# EAGLE board CT_schematic (EAGLE 7.6.0)

Size 100 x 80 mm. Coordinates in mm from the lower left corner, seen from the top.
Outline: 0,0 100,0 100,80 0,80 0,0
Copper layers (1*16): Top 0.035mm / dielectric 1.5mm / Bottom 0.035mm
Design rules "default": minimum track width 10mil, minimum drill 24mil, track to track 8mil, track to pad 8mil, pad to pad 8mil, via to via 8mil, smd to smd 8mil, copper to edge 40mil, drill to drill 8mil, minimum pad ring 10mil, minimum via ring 8mil, stop-mask expansion 4mil, vias tented up to drill 0mil, thermal gap 10mil

## Footprints (pad centres in the part's own frame; a part is rotated, then mirrored left to right if it is on the bottom)
C0603 = smd 0.8 x 0.8: 1 -0.762,0; 2 0.762,0
C0402 = smd 0.5 x 0.5: 1 -0.508,0; 2 0.508,0
C0805 = smd 1.2 x 1.3: 1 -1.016,0; 2 1.016,0
C1210 = smd 1.2 x 2.5: 1 -1.524,0; 2 1.524,0
C1206 = smd 1.3 x 1.6: 1 -1.524,0; 2 1.524,0
2220 = smd 1.85 x 5.5: 1 -2.55,0; 2 2.55,0
R0603 = smd 0.8 x 0.8: 1 -0.762,0; 2 0.762,0
EXV-9H = smd 3.505 x 1.676: 1 -2.857,0; 2 2.857,0
L0603 = smd 0.8 x 0.8: 1 -0.762,0; 2 0.762,0
DR1040 = smd 1.6 x 3.2: 1 -4.458,0; 2 4.458,0
L1210 = smd 1.2 x 2.5: 1 -1.524,0; 2 1.524,0
PJ-037B_PACKAGE = drill 3.7 square: 1 12,0 | drill 3.2 square: 2 6,0
LQFP176 = smd 0.3 x 1.2: 1 -10.75,-12.75; 2 -10.25,-12.75; 3 -9.75,-12.75; 4 -9.25,-12.75; 5 -8.75,-12.75; 6 -8.25,-12.75; 7 -7.75,-12.75; 8 -7.25,-12.75; 9 -6.75,-12.75; 10 -6.25,-12.75; 11 -5.75,-12.75; 12 -5.25,-12.75; 13 -4.75,-12.75; 14 -4.25,-12.75; 15 -3.75,-12.75; 16 -3.25,-12.75; 17 -2.75,-12.75; 18 -2.25,-12.75; 19 -1.75,-12.75; 20 -1.25,-12.75; 21 -0.75,-12.75; 22 -0.25,-12.75; 23 0.25,-12.75; 24 0.75,-12.75; 25 1.25,-12.75; 26 1.75,-12.75; 27 2.25,-12.75; 28 2.75,-12.75; 29 3.25,-12.75; 30 3.75,-12.75; 31 4.25,-12.75; 32 4.75,-12.75; 33 5.25,-12.75; 34 5.75,-12.75; 35 6.25,-12.75; 36 6.75,-12.75; 37 7.25,-12.75; 38 7.75,-12.75; 39 8.25,-12.75; 40 8.75,-12.75; 41 9.25,-12.75; 42 9.75,-12.75; 43 10.25,-12.75; 44 10.75,-12.75; 89 10.75,12.75; 90 10.25,12.75; 91 9.75,12.75; 92 9.25,12.75; 93 8.75,12.75; 94 8.25,12.75; 95 7.75,12.75; 96 7.25,12.75; 97 6.75,12.75; 98 6.25,12.75; 99 5.75,12.75; 100 5.25,12.75; 101 4.75,12.75; 102 4.25,12.75; 103 3.75,12.75; 104 3.25,12.75; 105 2.75,12.75; 106 2.25,12.75; 107 1.75,12.75; 108 1.25,12.75; 109 0.75,12.75; 110 0.25,12.75; 111 -0.25,12.75; 112 -0.75,12.75; 113 -1.25,12.75; 114 -1.75,12.75; 115 -2.25,12.75; 116 -2.75,12.75; 117 -3.25,12.75; 118 -3.75,12.75; 119 -4.25,12.75; 120 -4.75,12.75; 121 -5.25,12.75; 122 -5.75,12.75; 123 -6.25,12.75; 124 -6.75,12.75; 125 -7.25,12.75; 126 -7.75,12.75; 127 -8.25,12.75; 128 -8.75,12.75; 129 -9.25,12.75; 130 -9.75,12.75; 131 -10.25,12.75; 132 -10.75,12.75 | smd 1.2 x 0.3: 45 12.75,-10.75; 46 12.75,-10.25; 47 12.75,-9.75; 48 12.75,-9.25; 49 12.75,-8.75; 50 12.75,-8.25; 51 12.75,-7.75; 52 12.75,-7.25; 53 12.75,-6.75; 54 12.75,-6.25; 55 12.75,-5.75; 56 12.75,-5.25; 57 12.75,-4.75; 58 12.75,-4.25; 59 12.75,-3.75; 60 12.75,-3.25; 61 12.75,-2.75; 62 12.75,-2.25; 63 12.75,-1.75; 64 12.75,-1.25; 65 12.75,-0.75; 66 12.75,-0.25; 67 12.75,0.25; 68 12.75,0.75; 69 12.75,1.25; 70 12.75,1.75; 71 12.75,2.25; 72 12.75,2.75; 73 12.75,3.25; 74 12.75,3.75; 75 12.75,4.25; 76 12.75,4.75; 77 12.75,5.25; 78 12.75,5.75; 79 12.75,6.25; 80 12.75,6.75; 81 12.75,7.25; 82 12.75,7.75; 83 12.75,8.25; 84 12.75,8.75; 85 12.75,9.25; 86 12.75,9.75; 87 12.75,10.25; 88 12.75,10.75; 133 -12.75,10.75; 134 -12.75,10.25; 135 -12.75,9.75; 136 -12.75,9.25; 137 -12.75,8.75; 138 -12.75,8.25; 139 -12.75,7.75; 140 -12.75,7.25; 141 -12.75,6.75; 142 -12.75,6.25; 143 -12.75,5.75; 144 -12.75,5.25; 145 -12.75,4.75; 146 -12.75,4.25; 147 -12.75,3.75; 148 -12.75,3.25; 149 -12.75,2.75; 150 -12.75,2.25; 151 -12.75,1.75; 152 -12.75,1.25; 153 -12.75,0.75; 154 -12.75,0.25; 155 -12.75,-0.25; 156 -12.75,-0.75; 157 -12.75,-1.25; 158 -12.75,-1.75; 159 -12.75,-2.25; 160 -12.75,-2.75; 161 -12.75,-3.25; 162 -12.75,-3.75; 163 -12.75,-4.25; 164 -12.75,-4.75; 165 -12.75,-5.25; 166 -12.75,-5.75; 167 -12.75,-6.25; 168 -12.75,-6.75; 169 -12.75,-7.25; 170 -12.75,-7.75; 171 -12.75,-8.25; 172 -12.75,-8.75; 173 -12.75,-9.25; 174 -12.75,-9.75; 175 -12.75,-10.25; 176 -12.75,-10.75
SAMTEC_FTSH-105-01-L-DV-K = smd 0.762 x 2.794: 1 -2.54,-2.032; 2 -2.54,2.032; 3 -1.27,-2.032; 4 -1.27,2.032; 5 0,-2.032; 6 0,2.032; 7 1.27,-2.032; 8 1.27,2.032; 9 2.54,-2.032; 10 2.54,2.032
LH430WV2-SD01 = smd 0.23 x 0.7: 1 0,0; 2 -0.4,0; 3 -0.8,0; 4 -1.2,0; 5 -1.6,0; 6 -2,0; 7 -2.4,0; 8 -2.8,0; 9 -3.2,0; 10 -3.6,0; 11 -4,0; 12 -4.4,0; 13 -4.8,0; 14 -5.2,0; 15 -5.6,0; 16 -5.6,-2.15; 17 -5.2,-2.15; 18 -4.8,-2.15; 19 -4.4,-2.15; 20 -4,-2.15; 21 -3.6,-2.15; 22 -3.2,-2.15; 23 -2.8,-2.15; 24 -2.4,-2.15; 25 -2,-2.15; 26 -1.6,-2.15; 27 -1.2,-2.15; 28 -0.8,-2.15; 29 -0.4,-2.15; 30 0,-2.15
MOLEX_47219-2001 = smd 0.8 x 1.5: 1 3.2,-2.1; 2 2.1,-2.1; 3 1,-2.1; 4 -0.1,-2.1; 5 -1.2,-2.1; 6 -2.3,-2.1; 7 -3.4,-2.1; 8 -4.5,-2.1 | smd 1.5 x 2.05: G1 6.875,-4.7; G2 6.875,3.6; G3 -6.875,3.6; G4 -6.875,-4.7
QFN-28 = smd 0.813 x 0.305: 1 -2.451,1.5; 2 -2.451,1; 3 -2.451,0.5; 4 -2.451,0; 5 -2.451,-0.5; 6 -2.451,-1; 7 -2.451,-1.5; 15 2.451,-1.5; 16 2.451,-1; 17 2.451,-0.5; 18 2.451,0; 19 2.451,0.5; 20 2.451,1; 21 2.451,1.5 | smd 0.305 x 0.813: 8 -1.5,-2.451; 9 -1,-2.451; 10 -0.5,-2.451; 11 0,-2.451; 12 0.5,-2.451; 13 1,-2.451; 14 1.5,-2.451; 22 1.5,2.451; 23 1,2.451; 24 0.5,2.451; 25 0,2.451; 26 -0.5,2.451; 27 -1,2.451; 28 -1.5,2.451 | smd 3.607 x 3.607: 29 0,0
SJ-43515TS-SMT-TR = smd 2.2 x 3: 1 0.6,-7.4; 4 3.4,-7.4 | smd 3 x 3: 2 12.8,-7.4; 5 17,-3 | smd 2 x 3: 3 5.3,0; 6 2.5,0 | drill 1.8: P$7 4.5,-3.69; P$8 11.54,-3.69
ABS07-32.768KHZ-7-T = smd 1.1 x 2.4: 1 -2.5,0; 2 0,0
ABLS-25.000MHZ-B2F-T = smd 5.6 x 2.8: 1 -3.81,0; 2 5.69,0
ABLS-12.288MHZ-B4-T = smd 5.6 x 2.8: 1 -3.81,0; 2 5.69,0
WSON-8 = smd 0.3 x 0.6: 1 -0.75,0; 2 0.05,0; 3 0.85,0; 4 1.65,0; 5 1.65,3.8; 6 0.85,3.8; 7 0.05,3.8; 8 -0.75,3.8 | smd 3 x 2.6: PAD 0.45,1.9
SOIC-8_EP = smd 1.6 x 0.533: 1 -2.921,1.905; 2 -2.921,0.635; 3 -2.921,-0.635; 4 -2.921,-1.905; 5 2.921,-1.905; 6 2.921,-0.635; 7 2.921,0.635; 8 2.921,1.905 | smd 2.54 x 3.302: EPAD 0,0 | drill 0.406 pad 0.406: P$1 -0.508,0.635; P$2 0.381,0.635; P$3 -0.508,-0.635; P$4 0.381,-0.635
QFN-16_EP = smd 0.805 x 0.3: 1 -1.452,0.75; 2 -1.452,0.25; 3 -1.452,-0.25; 4 -1.452,-0.75; 9 1.452,-0.75; 10 1.452,-0.25; 11 1.452,0.25; 12 1.452,0.75 | smd 0.3 x 0.805: 5 -0.75,-1.452; 6 -0.25,-1.452; 7 0.25,-1.452; 8 0.75,-1.452; 13 0.75,1.452; 14 0.25,1.452; 15 -0.25,1.452; 16 -0.75,1.452 | smd 1.55 x 1.55: 17 0,0
DFN-8_DDB = smd 0.805 x 0.3: 1 -0.952,0.75; 2 -0.952,0.25; 3 -0.952,-0.25; 4 -0.952,-0.75; 5 0.952,-0.75; 6 0.952,-0.25; 7 0.952,0.25; 8 0.952,0.75 | smd 0.61 x 2.2: 9 0,0
QFN-38_UHF = smd 0.75 x 0.3: 1 -2.4,2.75; 2 -2.4,2.25; 3 -2.4,1.75; 4 -2.4,1.25; 6 -2.4,0.25; 7 -2.4,-0.25; 8 -2.4,-0.75; 9 -2.4,-1.25; 10 -2.4,-1.75; 11 -2.4,-2.25; 12 -2.4,-2.75; 20 2.4,-2.75; 21 2.4,-2.25; 22 2.4,-1.75; 23 2.4,-1.25; 24 2.4,-0.75; 25 2.4,-0.25; 26 2.4,0.25; 27 2.4,0.75; 28 2.4,1.25; 29 2.4,1.75; 30 2.4,2.25; 31 2.4,2.75 | smd 0.758 x 0.3: 5 -2.4,0.75 | smd 0.3 x 0.75: 13 -1.5,-3.4; 14 -1,-3.4; 15 -0.5,-3.4; 16 0,-3.4; 17 0.5,-3.4; 18 1,-3.4; 19 1.5,-3.4; 32 1.5,3.4; 33 1,3.4; 34 0.5,3.4; 35 0,3.4; 36 -0.5,3.4; 37 -1,3.4; 38 -1.5,3.4 | smd 3.2 x 5.2: 39 0,0
IRF8306MTRPBF = smd 0.9 x 1.85: 1 0,0; 2 0,-2.35; 6 6.4,0; 7 6.4,-2.35 | smd 0.75 x 0.75: 3 1.75,-1.175 | smd 1.45 x 0.87: 4 3.5,-0.565; 5 3.5,-1.785
SW_4-1437565-2 = smd 1.4 x 2.1: 1 -2.23,4.55; 2 -2.23,-4.55; 3 2.23,4.55; 4 2.23,-4.55
LGM67K-G1J2-24-Z = smd 0.8 x 1.4: A -2,0; C 0,0
NC7SZ125M5X = smd 1.3 x 0.7: 1 -1.3,0.95; 2 -1.3,0; 3 -1.3,-0.95; 4 1.3,-0.95; 5 1.3,0.95

## Placement (x,y rotation side)
C1  1e-06  [C0603]  -34.29,96.52 0 top  (outside the outline)
C2  1e-07  [C0603]  -38.1,96.52 0 top  (outside the outline)
C3  1e-07  [C0603]  -41.91,96.52 0 top  (outside the outline)
C4  1e-07  [C0603]  -45.72,96.52 0 top  (outside the outline)
C5  1e-07  [C0603]  -49.53,96.52 0 top  (outside the outline)
C6  1e-07  [C0603]  -53.34,96.52 0 top  (outside the outline)
C7  1e-07  [C0603]  -57.15,96.52 0 top  (outside the outline)
C8  1e-07  [C0603]  -60.96,96.52 0 top  (outside the outline)
C9  1e-07  [C0603]  -64.77,96.52 0 top  (outside the outline)
C10  1e-07  [C0603]  -68.58,96.52 0 top  (outside the outline)
C11  1e-07  [C0603]  -72.39,96.52 0 top  (outside the outline)
C12  1e-07  [C0603]  -76.2,96.52 0 top  (outside the outline)
C13  1e-07  [C0603]  -80.01,96.52 0 top  (outside the outline)
C14  1e-07  [C0603]  -83.82,96.52 0 top  (outside the outline)
C15  1e-07  [C0603]  -87.63,96.52 0 top  (outside the outline)
C16  1e-07  [C0603]  -91.44,96.52 0 top  (outside the outline)
C17  1e-07  [C0603]  -95.25,96.52 0 top  (outside the outline)
C18  4.7e-06  [C0603]  -15.24,96.52 0 top  (outside the outline)
C19  1e-07  [C0603]  -99.06,96.52 0 top  (outside the outline)
C20  1e-08  [C0603]  -15.24,101.6 0 top  (outside the outline)
C21  1e-06  [C0603]  -19.05,101.6 0 top  (outside the outline)
C22  1e-07  [C0603]  -22.86,101.6 0 top  (outside the outline)
C23  2.2e-06  [C0603]  -19.05,96.52 0 top  (outside the outline)
C24  1e-07  [C0603]  -26.67,101.6 0 top  (outside the outline)
C25  1e-07  [C0603]  -30.48,101.6 0 top  (outside the outline)
C26  1e-11  [C0402]  -39.37,106.68 0 top  (outside the outline)
C27  1e-11  [C0402]  -43.18,106.68 0 top  (outside the outline)
C28  1e-11  [C0402]  -46.99,106.68 0 top  (outside the outline)
C29  1e-11  [C0402]  -50.8,106.68 0 top  (outside the outline)
C30  1e-07  [C0402]  -54.61,106.68 0 top  (outside the outline)
C31  1e-07  [C0402]  -58.42,106.68 0 top  (outside the outline)
C32  1e-07  [C0402]  -62.23,106.68 0 top  (outside the outline)
C33  1e-07  [C0402]  -66.04,106.68 0 top  (outside the outline)
C34  1e-07  [C0402]  -69.85,106.68 0 top  (outside the outline)
C35  1e-07  [C0402]  -73.66,106.68 0 top  (outside the outline)
C36  1e-07  [C0402]  -77.47,106.68 0 top  (outside the outline)
C37  1e-05  [C0805]  -34.29,81.28 0 top  (outside the outline)
C38  2.2e-05  [C1210]  -24.13,73.66 0 top  (outside the outline)
C39  2.2e-05  [C1210]  -30.48,73.66 0 top  (outside the outline)
C40  1e-09  [C0402]  -81.28,106.68 0 top  (outside the outline)
C41  1e-09  [C0402]  -85.09,106.68 0 top  (outside the outline)
C42  1e-07  [C0402]  -88.9,106.68 0 top  (outside the outline)
C43  1e-07  [C0402]  -92.71,106.68 0 top  (outside the outline)
C44  1e-07  [C0402]  -96.52,106.68 0 top  (outside the outline)
C45  1e-07  [C0402]  -15.24,111.76 0 top  (outside the outline)
C46  1e-07  [C0402]  -19.05,111.76 0 top  (outside the outline)
C47  1e-05  [C0805]  -39.37,81.28 0 top  (outside the outline)
C48  1e-05  [C0805]  -44.45,81.28 0 top  (outside the outline)
C49  1e-05  [C0805]  -49.53,81.28 0 top  (outside the outline)
C50  1e-05  [C0805]  -54.61,81.28 0 top  (outside the outline)
C51  1e-05  [C0805]  -59.69,81.28 0 top  (outside the outline)
C52  2.2e-11  [C0402]  -31.75,106.68 0 top  (outside the outline)
C53  2.2e-11  [C0402]  -35.56,106.68 0 top  (outside the outline)
C54  1e-08  [C0402]  -22.86,111.76 0 top  (outside the outline)
C55  1e-05  [C1206]  -81.28,73.66 0 top  (outside the outline)
C56  1e-05  [C0805]  -64.77,81.28 0 top  (outside the outline)
C57  1e-05  [C1210]  -36.83,73.66 0 top  (outside the outline)
C58  1e-05  [C1210]  -43.18,73.66 0 top  (outside the outline)
C59  1e-05  [C1210]  -49.53,73.66 0 top  (outside the outline)
C60  1e-05  [C1210]  -55.88,73.66 0 top  (outside the outline)
C61  1e-08  [C0402]  -26.67,111.76 0 top  (outside the outline)
C62  1e-05  [C1206]  -87.63,73.66 0 top  (outside the outline)
C63  1e-05  [C1210]  -62.23,73.66 0 top  (outside the outline)
C64  1e-05  [C0805]  -69.85,81.28 0 top  (outside the outline)
C65  1e-06  [C0603]  -34.29,101.6 0 top  (outside the outline)
C66  1e-07  [C0402]  -30.48,111.76 0 top  (outside the outline)
C67  6.8e-05  [2220]  -77.47,46.99 0 top  (outside the outline)
C68  1e-05  [C1210]  -68.58,73.66 0 top  (outside the outline)
C69  2.2e-06  [C0603]  -22.86,96.52 0 top  (outside the outline)
C70  2.2e-07  [C0603]  -26.67,96.52 0 top  (outside the outline)
C71  1e-08  [C0402]  -34.29,111.76 0 top  (outside the outline)
C72  1e-05  [C1206]  -93.98,73.66 0 top  (outside the outline)
C73  1e-05  [C0805]  -74.93,81.28 0 top  (outside the outline)
C74  1e-07  [C0402]  -38.1,111.76 0 top  (outside the outline)
C75  2.2e-06  [C0603]  -30.48,96.52 0 top  (outside the outline)
C76  2.45e-08  [R0603]  -77.47,86.36 0 top  (outside the outline)
C77  2.8258362168397e-09  [R0603]  -85.09,80.01 0 top  (outside the outline)
C78  7.105e-09  [R0603]  -16.51,86.36 0 top  (outside the outline)
C79  0.0001  [EXV-9H]  -67.31,58.42 0 top  (outside the outline)
C80  0.0001  [EXV-9H]  -78.74,58.42 0 top  (outside the outline)
C81  1e-08  [C0402]  -41.91,111.76 0 top  (outside the outline)
C82  1e-08  [C0402]  -45.72,111.76 0 top  (outside the outline)
C83  1e-08  [C0402]  -49.53,111.76 0 top  (outside the outline)
F1  240.0  [L0603]  -38.1,101.6 0 top  (outside the outline)
I1  5.2e-06  [DR1040]  -38.1,46.99 0 top  (outside the outline)
I2  1e-05  [L1210]  -74.93,73.66 0 top  (outside the outline)
J1  PJ-037B  [PJ-037B_PACKAGE]  -83.82,34.29 0 top  (outside the outline)
R2  1000.0  [R0603]  -41.91,101.6 0 top  (outside the outline)
R7  4700.0  [R0603]  -45.72,101.6 0 top  (outside the outline)
R8  4700.0  [R0603]  -49.53,101.6 0 top  (outside the outline)
R9  2200.0  [R0603]  -53.34,101.6 0 top  (outside the outline)
R10  10000.0  [R0603]  -82.55,86.36 0 top  (outside the outline)
R11  10000.0  [R0603]  -87.63,86.36 0 top  (outside the outline)
R12  10000.0  [R0603]  -92.71,86.36 0 top  (outside the outline)
R13  10000.0  [R0603]  -97.79,86.36 0 top  (outside the outline)
R14  10000.0  [R0603]  -15.24,91.44 0 top  (outside the outline)
R15  10000.0  [R0603]  -20.32,91.44 0 top  (outside the outline)
R16  5.0  [R0603]  -57.15,101.6 0 top  (outside the outline)
R17  10000.0  [R0603]  -25.4,91.44 0 top  (outside the outline)
R18  100000.0  [R0603]  -21.59,86.36 0 top  (outside the outline)
R19  100000.0  [R0603]  -26.67,86.36 0 top  (outside the outline)
R20  100000.0  [R0603]  -31.75,86.36 0 top  (outside the outline)
R21  100000.0  [R0603]  -36.83,86.36 0 top  (outside the outline)
R22  100000.0  [R0603]  -41.91,86.36 0 top  (outside the outline)
R23  100000.0  [R0603]  -46.99,86.36 0 top  (outside the outline)
R24  47000.0  [R0603]  -30.48,91.44 0 top  (outside the outline)
R25  47000.0  [R0603]  -35.56,91.44 0 top  (outside the outline)
R26  47000.0  [R0603]  -40.64,91.44 0 top  (outside the outline)
R27  680.0  [R0603]  -60.96,101.6 0 top  (outside the outline)
R28  100000.0  [R0603]  -52.07,86.36 0 top  (outside the outline)
R29  200.0  [R0603]  -64.77,101.6 0 top  (outside the outline)
R30  1000.0  [R0603]  -68.58,101.6 0 top  (outside the outline)
R31  910.0  [R0603]  -72.39,101.6 0 top  (outside the outline)
R32  2200.0  [R0603]  -76.2,101.6 0 top  (outside the outline)
R33  100000.0  [R0603]  -57.15,86.36 0 top  (outside the outline)
R34  1800.0  [R0603]  -80.01,101.6 0 top  (outside the outline)
R35  1000.0  [R0603]  -83.82,101.6 0 top  (outside the outline)
R36  20000.0  [R0603]  -45.72,91.44 0 top  (outside the outline)
R37  91000.0  [R0603]  -50.8,91.44 0 top  (outside the outline)
R38  300000.0  [R0603]  -62.23,86.36 0 top  (outside the outline)
R39  100000.0  [R0603]  -67.31,86.36 0 top  (outside the outline)
R40  1600000.0  [R0603]  -97.79,80.01 0 top  (outside the outline)
R41  100000.0  [R0603]  -72.39,86.36 0 top  (outside the outline)
R42  200.0  [R0603]  -87.63,101.6 0 top  (outside the outline)
R43  1000.0  [R0603]  -91.44,101.6 0 top  (outside the outline)
R44  10000.0  [R0603]  -55.88,91.44 0 top  (outside the outline)
R45  75000.0  [R0603]  -60.96,91.44 0 top  (outside the outline)
R46  10000.0  [R0603]  -66.04,91.44 0 top  (outside the outline)
R47  10000.0  [R0603]  -71.12,91.44 0 top  (outside the outline)
R48  95300.0  [R0603]  -76.2,91.44 0 top  (outside the outline)
R49  95300.0  [R0603]  -81.28,91.44 0 top  (outside the outline)
R50  10000.0  [R0603]  -86.36,91.44 0 top  (outside the outline)
R51  10000.0  [R0603]  -91.44,91.44 0 top  (outside the outline)
R52  10000.0  [R0603]  -96.52,91.44 0 top  (outside the outline)
R53  83745.454545455  [R0603]  -92.71,80.01 0 top  (outside the outline)
U1  STM32F779IIT6  [LQFP176]  -26.67,13.97 0 top  (outside the outline)
U2  FTSH-105-01-L-DV-K  [SAMTEC_FTSH-105-01-L-DV-K]  -83.82,7.62 0 top  (outside the outline)
U3  LH430WV2-SD01  [LH430WV2-SD01]  -15.24,107.95 0 top  (outside the outline)
U4  0472192001  [MOLEX_47219-2001]  -50.8,8.89 0 top  (outside the outline)
U5  WM8731CLSEFL  [QFN-28]  -16.51,74.93 0 top  (outside the outline)
U6  SJ-43515TS-SMT-TR  [SJ-43515TS-SMT-TR]  -39.37,36.83 0 top  (outside the outline)
U7  SJ-43515TS-SMT-TR  [SJ-43515TS-SMT-TR]  -67.31,36.83 0 top  (outside the outline)
U8  ABS07-32.768KHZ-7-T  [ABS07-32.768KHZ-7-T]  -69.85,67.31 0 top  (outside the outline)
U9  ABLS-25.000MHZ-B2F-T  [ABLS-25.000MHZ-B2F-T]  -26.67,67.31 0 top  (outside the outline)
U10  ABLS-12.288MHZ-B4-T  [ABLS-12.288MHZ-B4-T]  -46.99,67.31 0 top  (outside the outline)
U11  LP3878SDX-ADJ/NOPB  [WSON-8]  -99.06,44.45 0 top  (outside the outline)
U12  MIC5234YME  [SOIC-8_EP]  -78.74,66.04 0 top  (outside the outline)
U13  LP3878SDX-ADJ/NOPB  [WSON-8]  -30.48,57.15 0 top  (outside the outline)
U14  LTC3601EUD#PBF  [QFN-16_EP]  -25.4,106.68 0 top  (outside the outline)
U15  LT3494AEDDB#TRMPBF  [DFN-8_DDB]  -53.34,111.76 0 top  (outside the outline)
U16  LP3878SDX-ADJ/NOPB  [WSON-8]  -50.8,57.15 0 top  (outside the outline)
U17  LTC2928CUHF#PBF  [QFN-38_UHF]  -57.15,58.42 0 top  (outside the outline)
U18  IRF8306MTRPbF  [IRF8306MTRPBF]  -57.15,48.26 0 top  (outside the outline)
U19  IRF8306MTRPbF  [IRF8306MTRPBF]  -72.39,48.26 0 top  (outside the outline)
U20  4-1437565-2  [SW_4-1437565-2]  -27.94,48.26 0 top  (outside the outline)
U21  Q65110A2395  [LGM67K-G1J2-24-Z]  -87.63,67.31 0 top  (outside the outline)
U22  nc7sz125m5x  [NC7SZ125M5X]  -15.24,80.01 0 top  (outside the outline)
U23  nc7sz125m5x  [NC7SZ125M5X]  -21.59,80.01 0 top  (outside the outline)
U24  nc7sz125m5x  [NC7SZ125M5X]  -27.94,80.01 0 top  (outside the outline)

## Library data of the parts
C1-C83 F1 I1 I2 J1 R2 R7-R53 U1-U24 = circuit_tree

## Nets
CLK_CRYSTAL_U1_9: C26.1 U1.9 U8.1
CLK_CRYSTAL_U1_10: C27.1 U1.10 U8.2
CLK_CRYSTAL_U1_29: C28.1 U1.29 U9.1
CLK_CRYSTAL_U1_30: C29.1 U1.30 U9.2
CLK_CRYSTAL_U5_1: C52.1 U5.1 U10.1
CLK_CRYSTAL_U5_2: C53.1 U5.2 U10.2
GND: C1.2 C2.2 C3.2 C4.2 C5.2 C6.2 C7.2 C8.2 C9.2 C10.2 C11.2 C12.2 C13.2 C14.2 C15.2 C16.2 C17.2 C18.2 C19.2 C20.2 C21.2 C22.2 C23.2 C24.2 C25.2 C26.2 C27.2 C28.2 C29.2 C30.2 C31.2 C32.2 C33.2 C34.2 C35.2 C36.2 C37.2 C41.2 C42.2 C43.2 C44.2 C45.2 C46.2 C47.2 C48.2 C49.2 C50.2 C51.2 C52.2 C53.2 C54.2 C55.2 C56.2 C57.2 C58.2 C59.2 C60.2 C61.2 C62.2 C63.2 C64.2 C65.2 C67.1 C67.2 C68.2 C69.2 C70.2 C71.2 C72.2 C73.2 C74.2 C75.2 C76.2 C77.2 C78.2 C79.2 C80.2 C81.2 C82.2 C83.2 J1.2 R2.2 R10.2 R16.2 R17.2 R24.2 R25.2 R26.2 R30.2 R32.2 R35.2 R36.2 R38.2 R43.2 R45.2 R48.2 R49.2 R50.2 R51.2 R52.2 U1.14 U1.22 U1.37 U1.61 U1.71 U1.95 U1.103 U1.109 U1.117 U1.130 U1.135 U1.148 U1.158 U2.3 U2.5 U3.1 U3.6 U3.9 U3.12 U3.15 U3.17 U3.18 U3.19 U3.24 U3.27 U4.6 U4.G1 U4.G2 U4.G3 U4.G4 U5.4 U5.15 U5.19 U5.25 U5.26 U5.29 U6.1 U7.1 U11.3 U11.PAD U12.7 U12.EPAD U13.3 U13.PAD U14.1 U14.9 U14.17 U15.2 U15.9 U16.3 U16.PAD U17.8 U17.9 U17.10 U17.12 U17.13 U17.24 U17.25 U17.30 U17.32 U17.39 U21.C U22.2 U22.3 U23.1 U23.3 U24.1 U24.3
NET_U1_31: R8.1 U1.31 U24.4
NET_U1_39: C20.1 C21.1 F1.1 U1.38 U1.39
NET_U1_48: R12.1 U1.48
NET_U1_106: C23.1 U1.100 U1.106
NET_U1_129: C25.1 U1.129
NET_U1_166: R10.1 U1.166
NET_U1_171: R11.1 U1.171
NET_U1_175: U21.A
NET_U1_176: U20.3 U20.4
NET_U2_9: R16.1 U2.9
NET_U3_4: R7.1 U3.4 U23.4
NET_U3_5: R9.1
NET_U3_20: R17.1 U3.20
NET_U5_9: U5.9
NET_U5_20: C46.1 C51.1 U5.20
NET_U6_2: C39.1 R25.1 U6.2
NET_U6_5: C38.1 R24.1 U6.5
NET_U6_13: C38.2
NET_U6_14: C39.2
NET_U7_5: C40.1 C41.1 R26.1 R27.1 U7.5
NET_U7_21: R27.2
NET_U7_22: C40.2
NET_U11_1: C54.1 U11.1
NET_U11_6: R29.2 R30.1 U11.6
NET_U11_8: R28.1 U11.8
NET_U12_4: R31.2 R32.1 U12.4
NET_U13_1: C61.1 U13.1
NET_U13_6: R34.2 R35.1 U13.6
NET_U13_8: R33.1 U13.8
NET_U14_3: C66.2 I1.1 U14.3 U14.4
NET_U14_6: C66.1 U14.6
NET_U14_7: C65.1 U14.7 U14.12
NET_U14_10: R38.1 U14.10
NET_U14_11: R36.1 R37.1 U14.11
NET_U14_14: U14.14
NET_U14_ATNET_3: I1.2 R37.2
NET_U15_1: I2.1 U15.1
NET_U15_5: R39.1 U15.5
NET_U15_6: R40.1 U15.6
NET_U15_8: C70.1 U15.8
NET_U16_1: C71.1 U16.1
NET_U16_6: R42.2 R43.1 U16.6
NET_U16_8: R41.1 U16.8
NET_U17_3: R51.1 U17.3
NET_U17_6: R48.1 U17.6
NET_U17_7: R49.1 U17.7
NET_U17_16: R50.1 R53.1 U17.16
NET_U17_18: R47.1 U17.18
NET_U17_19: R46.1 U17.19 U17.20
NET_U17_21: R44.1 R45.1 U17.21 U22.4 U23.2 U24.2
NET_U17_22: C74.1 R44.2 R46.2 R47.2 U17.11 U17.22
NET_U17_26: C77.1 U17.26
NET_U17_27: C76.1 U17.27
NET_U17_28: C78.1 U17.28
NET_U17_38: R52.1 U17.38
NET_U18_3: U17.2 U18.3
NET_U19_3: U17.37 U19.3
NET_U20_1: R2.1 U20.1 U20.2
PROC_DSIHOST_CKN: U1.105 U3.13
PROC_DSIHOST_CKP: U1.104 U3.14
PROC_DSIHOST_D0N: U1.102 U3.7
PROC_DSIHOST_D0P: U1.101 U3.8
PROC_DSIHOST_D1N: U1.108 U3.10
PROC_DSIHOST_D1P: U1.107 U3.11
PROC_I2S1_CK: U1.51 U5.7
PROC_I2S1_SD: U1.53 U5.8
PROC_I2S1_WS: U1.50 U5.9 U5.11
PROC_SDMMC1_CK: R19.1 U1.141 U4.5
PROC_SDMMC1_CMD: R18.1 U1.144 U4.3
PROC_SDMMC1_D0: R20.1 U1.121 U4.7
PROC_SDMMC1_D1: R21.1 U1.122 U4.8
PROC_SDMMC1_D2: R22.1 U1.139 U4.1
PROC_SDMMC1_D3: R23.1 U1.140 U4.2
PROC_SYS_JTCK_SWCLK: R14.1 U1.137 U2.4
PROC_SYS_JTDO_SWO: U1.161 U2.6
PROC_SYS_JTMS_SWDIO: R15.1 U1.128 U2.2
RST_OUT_U2_JTAG_RST_B: R13.1 U2.10 U22.1
VCC_10V5: C75.1 C79.1 C80.1 J1.1 R53.2 U17.23 U18.1 U18.2 U18.6 U18.7 U19.1 U19.2 U19.6 U19.7
VCC_S1_10V5: C55.1 C57.1 C58.1 C62.1 C64.1 C68.1 I2.2 R28.2 R33.2 R39.2 U11.4 U12.5 U12.8 U13.4 U14.15 U14.16 U15.3 U15.4 U18.4 U18.5
VCC_S2_10V5: C72.1 R41.2 U16.4 U19.4 U19.5
VCC_TIER1_1V2: C24.1 C56.1 R29.1 U1.81 U11.5
VCC_TIER1_1V5: C59.1 C60.1 R31.1 U3.29 U12.1
VCC_TIER1_2V8: C33.1 C34.1 C35.1 C63.1 R34.1 U3.16 U3.21 U3.22 U3.23 U13.5
VCC_TIER1_3V3: C1.1 C2.1 C3.1 C4.1 C5.1 C6.1 C7.1 C8.1 C9.1 C10.1 C11.1 C12.1 C13.1 C14.1 C15.1 C16.1 C17.1 C18.1 C19.1 C22.1 C30.1 C31.1 C36.1 C37.1 C42.1 C43.1 C44.1 C45.1 C47.1 C48.1 C49.1 C50.1 C67.2 C81.1 C82.1 C83.1 F1.2 I1.2 R7.2 R8.2 R9.2 R11.2 R12.2 R13.2 R14.2 R15.2 R18.2 R19.2 R20.2 R21.2 R22.2 R23.2 R37.2 U1.6 U1.15 U1.23 U1.36 U1.49 U1.62 U1.72 U1.82 U1.96 U1.99 U1.118 U1.131 U1.136 U1.149 U1.159 U1.172 U2.1 U3.2 U4.4 U5.3 U5.5 U5.12 U5.18 U14.8 U22.5 U23.5 U24.5
VCC_TIER1_12V0: C32.1 C69.1 R40.2 U3.30 U15.7
VCC_TIER2_1V2: C73.1 R42.1 U16.5

## Tracks (layer width: path | path; a pad name or v marks a point on that pad's centre or on a via)
CLK_CRYSTAL_U1_9  (2 unrouted)
CLK_CRYSTAL_U1_10  (2 unrouted)
CLK_CRYSTAL_U1_29  (2 unrouted)
CLK_CRYSTAL_U1_30  (2 unrouted)
CLK_CRYSTAL_U5_1  (2 unrouted)
CLK_CRYSTAL_U5_2  (2 unrouted)
GND  (167 unrouted)
NET_U1_31  (2 unrouted)
NET_U1_39  (4 unrouted)
NET_U1_48  (1 unrouted)
NET_U1_106  (2 unrouted)
NET_U1_129  (1 unrouted)
NET_U1_166  (1 unrouted)
NET_U1_171  (1 unrouted)
NET_U1_176  (1 unrouted)
NET_U2_9  (1 unrouted)
NET_U3_4  (2 unrouted)
NET_U3_20  (1 unrouted)
NET_U5_20  (2 unrouted)
NET_U6_2  (2 unrouted)
NET_U6_5  (2 unrouted)
NET_U7_5  (4 unrouted)
NET_U11_1  (1 unrouted)
NET_U11_6  (2 unrouted)
NET_U11_8  (1 unrouted)
NET_U12_4  (2 unrouted)
NET_U13_1  (1 unrouted)
NET_U13_6  (2 unrouted)
NET_U13_8  (1 unrouted)
NET_U14_3  (3 unrouted)
NET_U14_6  (1 unrouted)
NET_U14_7  (2 unrouted)
NET_U14_10  (1 unrouted)
NET_U14_11  (2 unrouted)
NET_U14_ATNET_3  (1 unrouted)
NET_U15_1  (1 unrouted)
NET_U15_5  (1 unrouted)
NET_U15_6  (1 unrouted)
NET_U15_8  (1 unrouted)
NET_U16_1  (1 unrouted)
NET_U16_6  (2 unrouted)
NET_U16_8  (1 unrouted)
NET_U17_3  (1 unrouted)
NET_U17_6  (1 unrouted)
NET_U17_7  (1 unrouted)
NET_U17_16  (2 unrouted)
NET_U17_18  (1 unrouted)
NET_U17_19  (2 unrouted)
NET_U17_21  (5 unrouted)
NET_U17_22  (5 unrouted)
NET_U17_26  (1 unrouted)
NET_U17_27  (1 unrouted)
NET_U17_28  (1 unrouted)
NET_U17_38  (1 unrouted)
NET_U18_3  (1 unrouted)
NET_U19_3  (1 unrouted)
NET_U20_1  (2 unrouted)
PROC_DSIHOST_CKN  (1 unrouted)
PROC_DSIHOST_CKP  (1 unrouted)
PROC_DSIHOST_D0N  (1 unrouted)
PROC_DSIHOST_D0P  (1 unrouted)
PROC_DSIHOST_D1N  (1 unrouted)
PROC_DSIHOST_D1P  (1 unrouted)
PROC_I2S1_CK  (1 unrouted)
PROC_I2S1_SD  (1 unrouted)
PROC_I2S1_WS  (2 unrouted)
PROC_SDMMC1_CK  (2 unrouted)
PROC_SDMMC1_CMD  (2 unrouted)
PROC_SDMMC1_D0  (2 unrouted)
PROC_SDMMC1_D1  (2 unrouted)
PROC_SDMMC1_D2  (2 unrouted)
PROC_SDMMC1_D3  (2 unrouted)
PROC_SYS_JTCK_SWCLK  (2 unrouted)
PROC_SYS_JTDO_SWO  (1 unrouted)
PROC_SYS_JTMS_SWDIO  (2 unrouted)
RST_OUT_U2_JTAG_RST_B  (2 unrouted)
VCC_10V5  (13 unrouted)
VCC_S1_10V5  (19 unrouted)
VCC_S2_10V5  (4 unrouted)
VCC_TIER1_1V2  (4 unrouted)
VCC_TIER1_1V5  (4 unrouted)
VCC_TIER1_2V8  (9 unrouted)
VCC_TIER1_3V3  (79 unrouted)
VCC_TIER1_12V0  (4 unrouted)
VCC_TIER2_1V2  (2 unrouted)